# Altium PCB BT_806_PCB.PcbDoc
Units mil, origin at the board's own origin, x right, y up, seen from the top; angles counter-clockwise.
Board outline 3022.24 x 1519.71 mil, 2 copper layers (Top Layer, Bottom Layer); 53 components, 46 nets, 252 pads, 31 vias.
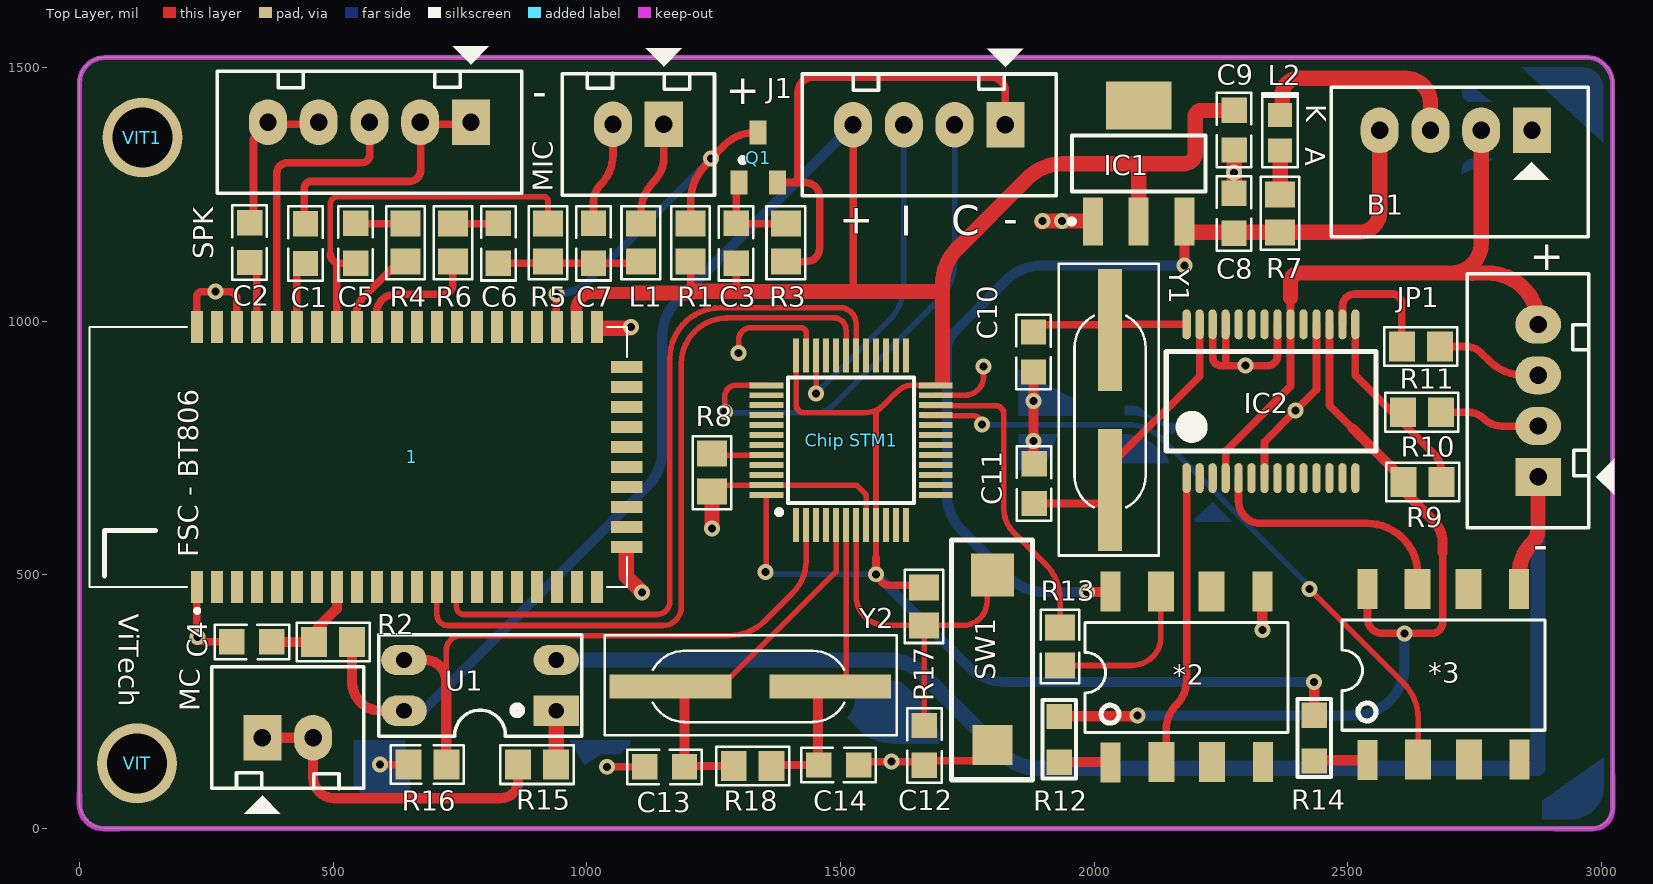
[diagram p0: Top Layer view]
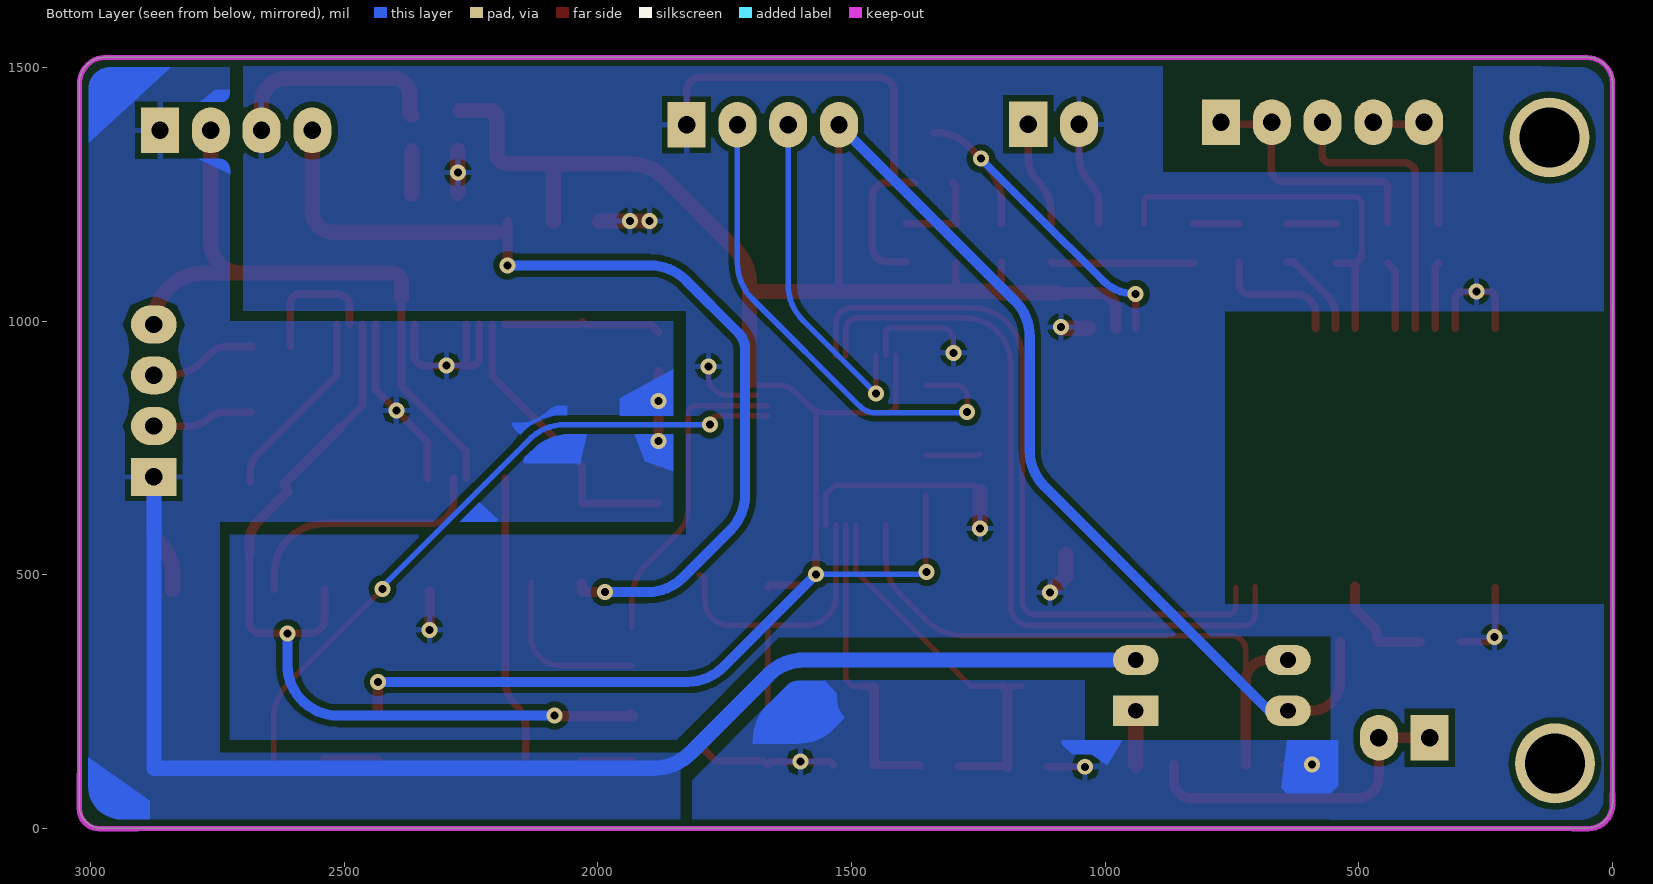
[diagram p1: Bottom Layer view, seen from below]
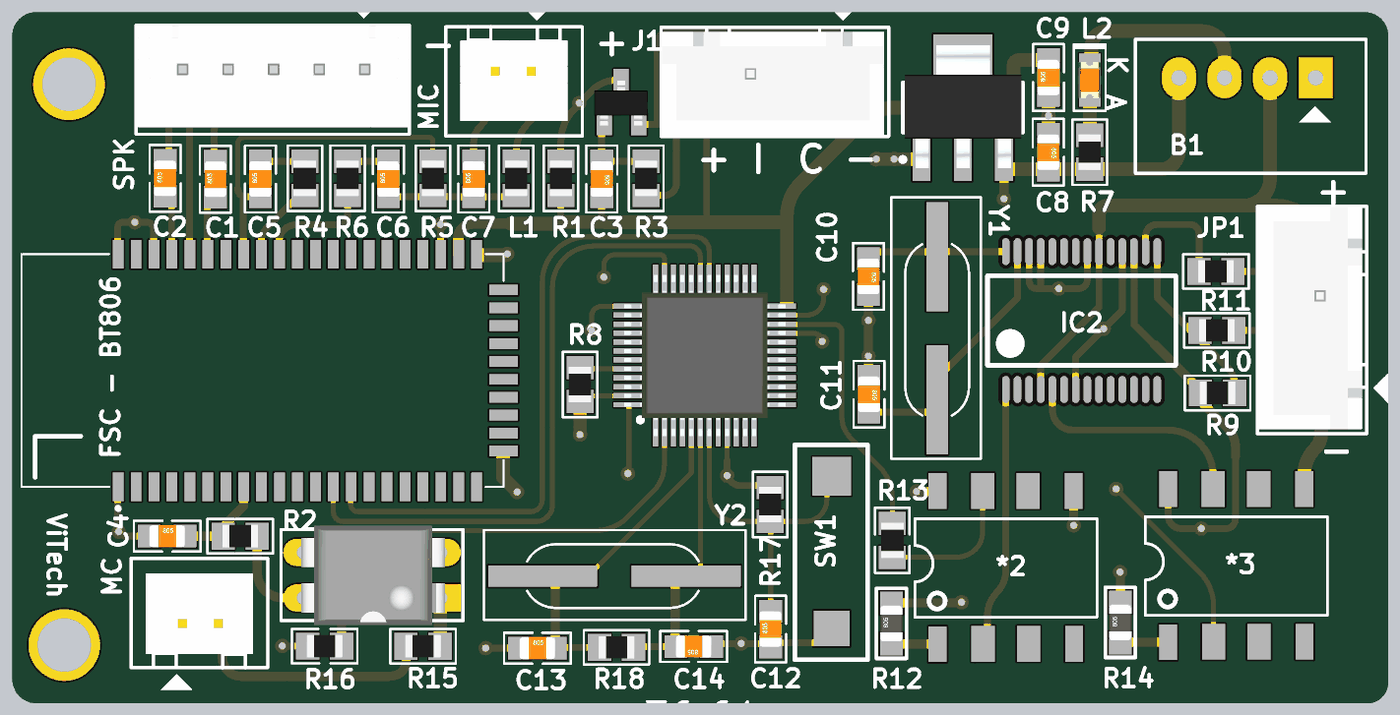
[diagram p2: 3D render of the assembled board from above, using the file's embedded part models]

## Layer stack, top to bottom
Top Solder: solder mask 0.4, Solder Resist, Dk 3.5
Top Layer: signal copper 1.4
Dielectric 1: dielectric 12.6, FR-4, Dk 4.8
Bottom Layer: signal copper 1.4
Bottom Solder: solder mask 0.4, Solder Resist, Dk 3.5

## Board outline
53.23,0.5 2976.38,0.5 ccw(c2976.38,46.04) 3021.91,46.04 3021.91,1468.35 ccw(c2970.05,1468.35) 2970.05,1520.21 51.76,1520.21 ccw(c51.76,1468.12) -0.33,1468.12 -0.33,54.07 ccw(c53.23,54.07)

## Design rules (kind name [scope] priority, off if disabled: settings)
Clearance [All] p1: gap=12
PolygonConnect [All] p1: connectstyle=Relief reliefconductorwidth=11 reliefentries=4 polygonreliefangle="90 Angle" airgapwidth=11
RoutingVias [All] p1: holewidth=15.75 width=31.5 viastyle="Through Hole" minholewidth=15.75 minwidth=31.5 maxholewidth=15.75 maxwidth=31.5
SolderMaskExpansion [All] p1: expansion=4
Width [All] p1: maxlimit=30 minlimit=11 preferedwidth=15
30 further rules are at their usual default settings.

## Components (designator, comment, footprint, x,y, rotation, side; value= is the part's Value field where it differs from the comment)
1 "FSC-BT806" FSCBT806 564.98,722.55 r90 top
*2 "HPCL2430" HPCL_A2430 2032.11,130.48 r90 top
*3 "HPCL2430" HPCL_A2430 2538.41,134.81 r90 top
B1 "" B0505S 2862.46,1375.92 r180 top
C1 "0.1µF" CAP_0805 445.74,1152.84 r90 top
C2 "0.1µF" CAP_0805 335.51,1154.87 r90 top
C3 "1uF" CAP_0805 1294.41,1153.46 r270 top
C4 "100nF" CAP_0805 340.04,368.07 r0 top
C5 "0.1µF" CAP_0805 544.67,1153.45 r90 top
C6 "0.1µF" CAP_0805 825.83,1153.45 r90 top
C7 "15pF" CAP_0805 1013.26,1153.45 r90 top
C8 "1uF" CAP_0805 2275.41,1212.37 r270 top
C9 "4.7uF" CAP_0805 2275.81,1376.55 r90 top
C10 "22pF" CAP_0805 1880.38,939.24 r270 top
C11 "22pF" CAP_0805 1881.49,679.93 r270 top
C12 "0.1uF" CAP_0805 1665.35,163.89 r90 top
C13 "22pF" CAP_0805 1153.22,121.64 r0 top
C14 "22pF" CAP_0805 1496.29,125.41 r180 top
"Chip STM1" "STM32F103C8T6" LQFP-48_19.6_393_58X11_SMD 1520.77,765.39 r90 top
IC1 "LM1117" SOT223-4N 2087.62,1310.4 r90 top
IC2 "PL2303HX" PL2303 2181.96,690.57 r0 top
J1 "" CON4 1824.8,1387.02 r180 top
JP1 "" CON4 2874.69,693.26 r90 top
L1 "15nH" RES_0805 1106.4,1154.82 r90 top
L2 "" LED_0805 2366.36,1371.03 r270 top
MC "" CON2 360.72,179.18 r0 top
MIC "JP2" CON2 1151.69,1387.88 r180 top (schematic designator MIC1)
Q1 "SI2302" SOT23A 1336.97,1322.32 r0 top
R1 "10K" RES_0805 1204.7,1154.82 r90 top
R2 "10K" RES_0805 500.14,367.93 r180 top
R3 "10K" RES_0805 1392.13,1154.83 r270 top
R4 "1K" RES_0805 642.38,1154.83 r270 top
R5 "2.2K" RES_0805 923.54,1154.82 r90 top
R6 "1K" RES_0805 736.1,1154.83 r270 top
R7 "1K" RES_0805 2366.36,1212.37 r270 top
R8 "10Kohm" RES_0805 1246.84,701.43 r270 top
R9 "1.5K" RES_0805 2647.07,682.85 r180 top
R10 "100R" RES_0805 2645.54,820.47 r0 top
R11 "100R" RES_0805 2643.68,950.08 r0 top
R12 "100R" "RES_0805 - Dup" 1930.66,221.03 r90 top
R13 "1K" RES_0805 1932.68,358.88 r90 top
R14 "100R" "RES_0805 - Dup" 2433.45,223.24 r90 top
R15 "100R" RES_0805 901.91,125.91 r180 top
R16 "100R" RES_0805 685.75,126.16 r0 top
R17 "10K" RES_0805 1664.52,437.74 r270 top
R18 "1M" RES_0805 1326.98,123.49 r0 top
SPK "JP5" CON5 771.64,1392.09 r180 top (schematic designator SPK1)
SW1 "" SW_342_SMD 1799.46,165.15 r270 top
U1 "PC817" DIP4/W0.3 939.82,232.26 r90 top
VIT "Comment" VIT 113.84,128.61 r0 top
VIT1 "Comment" VIT 124.28,1361.87 r0 top
Y1 "12MHz" XTAL_314_240X47_SMD 2031.07,667.55 r90 top
Y2 "8MHz" XTAL_314_240X47_SMD 1164.78,280.27 r0 top

## Footprints (in the part's own frame and the unit in brackets; to place one, negate y for a bottom-side part, rotate by r counter-clockwise, add the part's x,y. Pads: shape width x height; smd on the part's side, far side on the other; paste and mask are expansions set on the pad)
B0505S [mil] "CON4"
  rect 75x90 hole 34: 1(0,0)
  oval 75x90 hole 34: 2(100,0) 3(200,0) 4(300,0)
  silkscreen extent -111,-85 396,210
CAP_0805 [mil] "Ceramic Capacitor"
  rect 50x50 smd mask+3: 1(-39.37,0) 2(39.37,0)
  silkscreen extent -73,-34 73,34, body extent -39,-25 39,25, height 31
CON2 [mil] "CON2"
  rect 75x90 hole 34: 1(0,0)
  oval 75x90 hole 34: 2(100,0)
  silkscreen extent -100,-150 200,140, body extent -68,-70 168,107, height 236
CON4 [mil] "B1205S"
  rect 75x90 hole 34: 1(0,0)
  oval 75x90 hole 34: 2(100,0) 3(200,0) 4(300,0)
  silkscreen extent -100,-150 400,140, body extent -90,-90 398,136, height 276
CON5 [mil] "CON5"
  rect 75x90 hole 34: 1(0,0)
  oval 75x90 hole 34: 2(100,0) 3(200,0) 4(300,0) 5(400,0)
  silkscreen extent -100,-150 500,140, body extent -101,-98 496,125, height 288
DIP4/W0.3 [mil] "4 PIN, W 300mil, Pin to pin 100mil"
  rect 60x90 hole 31: 1(0,0)
  oval 60x90 hole 31: 2(100,0) 3(100,300) 4(0,300)
  silkscreen extent -50,-50 150,350, body extent -59,-10 159,305, height 170
FSCBT806 [mm]
  rect 1.6x0.6 smd: 1(-6.25,8.45) 2(-6.25,7.45) 3(-6.25,6.45) 4(-6.25,5.45) 5(-6.25,4.45) 6(-6.25,3.45) 7(-6.25,2.45) 8(-6.25,1.45) 9(-6.25,0.45) 10(-6.25,-0.55) 11(-6.25,-1.55) 12(-6.25,-2.55) 13(-6.25,-3.55) 14(-6.25,-4.55) 15(-6.25,-5.55) 16(-6.25,-6.55) 17(-6.25,-7.55) 18(-6.25,-8.55) 19(-6.25,-9.55) 20(-6.25,-10.55) 21(-6.25,-11.55) 32(6.75,-11.55) 33(6.75,-10.55) 34(6.75,-9.55) 35(6.75,-8.55) 36(6.75,-7.55) 37(6.75,-6.55) 38(6.75,-5.55) 39(6.75,-4.55) 40(6.75,-3.55) 41(6.75,-2.55) 42(6.75,-1.55) 43(6.75,-0.55) 44(6.75,0.45) 45(6.75,1.45) 46(6.75,2.45) 47(6.75,3.45) 48(6.75,4.45) 49(6.75,5.45) 50(6.75,6.45) 51(6.75,7.45) 52(6.75,8.45)
  rect 0.6x1.6 smd: 22(-4.25,-13.05) 23(-3.25,-13.05) 24(-2.25,-13.05) 25(-1.25,-13.05) 26(-0.25,-13.05) 27(0.75,-13.05) 28(1.75,-13.05) 29(2.75,-13.05) 30(3.75,-13.05) 31(4.75,-13.05)
  silkscreen extent -7.55,-13.05 6.75,13.85, body extent -6.22,-13.08 6.73,13.84, height 0.25
HPCL_A2430 [mm] "A2430"
  rect 2x1 smd: 1(0,0) 4(0.025,-7.62) 5(8.56,-7.595) 8(8.56,0)
  rect 2x1.3 smd: 2(0.025,-2.54) 3(0.025,-5.08) 6(8.56,-5.055) 7(8.56,-2.515)
  silkscreen extent 1.5,-8.89 7.01,1.27
LED_0805 [mm] "LED"
  rect 1.2x1.2 smd mask+0.076: A(0.889,0) K(-0.889,0)
  silkscreen extent -1.99,-0.89 1.73,0.89, body extent -1.01,-0.62 1.01,0.63, height 1.1
LQFP-48_19.6_393_58X11_SMD [mm] "48LQFP"
  rect 1.7x0.3 smd mask+0.076: 1(-4.238,2.75) 2(-4.238,2.25) 3(-4.238,1.75) 4(-4.238,1.25) 5(-4.238,0.75) 6(-4.238,0.25) 7(-4.238,-0.25) 8(-4.238,-0.75) 9(-4.238,-1.25) 10(-4.238,-1.75) 11(-4.238,-2.25) 12(-4.238,-2.75) 25(4.238,-2.75) 26(4.238,-2.25) 27(4.238,-1.75) 28(4.238,-1.25) 29(4.238,-0.75) 30(4.238,-0.25) 31(4.238,0.25) 32(4.238,0.75) 33(4.238,1.25) 34(4.238,1.75) 35(4.238,2.25) 36(4.238,2.75)
  rect 0.3x1.7 smd mask+0.076: 13(-2.75,-4.238) 14(-2.25,-4.238) 15(-1.75,-4.238) 16(-1.25,-4.238) 17(-0.75,-4.238) 18(-0.25,-4.238) 19(0.25,-4.238) 20(0.75,-4.238) 21(1.25,-4.238) 22(1.75,-4.238) 23(2.25,-4.238) 24(2.75,-4.238) 37(2.75,4.238) 38(2.25,4.238) 39(1.75,4.238) 40(1.25,4.238) 41(0.75,4.238) 42(0.25,4.238) 43(-0.25,4.238) 44(-0.75,4.238) 45(-1.25,4.238) 46(-1.75,4.238) 47(-2.25,4.238) 48(-2.75,4.238)
  silkscreen extent -3.72,-3.15 3.15,3.72, body extent -4.5,-4.5 4.5,4.5, height 1.7
PL2303 [mil] "PL2303"
  oval 16.53x59.03 smd mask+7.9: 1(0,0) 2(25.6,0) 3(51.18,0) 4(76.78,0) 5(102.37,0) 6(127.97,0) 7(153.57,0) 8(179.15,0) 9(204.75,0) 10(230.35,0) 11(255.93,0) 12(281.53,0) 13(307.12,0) 14(332.7,0) 15(332.7,303.18) 16(307.12,303.18) 17(281.53,303.18) 18(255.93,303.18) 19(230.35,303.18) 20(204.75,303.18) 21(179.15,303.18) 22(153.57,303.18) 23(127.97,303.18) 24(102.37,303.18) 25(76.78,303.18) 26(51.18,303.18) 27(25.6,303.18) 28(0,303.18)
  silkscreen extent -40,53 373,250
RES_0805 [mm] "Resister"
  rect 1.3x1.5 smd mask+0.076: 1(0.95,0) 2(-0.95,0)
  silkscreen extent -1.83,-0.97 1.83,0.97, body extent -1,-0.63 1,0.62, height 0.5
"RES_0805 - Dup" [mil] "Resister"
  rect 50x50 smd: 1(0,0) 2(-90,0)
  silkscreen extent -122,-33 32,33, body extent -84,-25 -6,25, height 31
SOT23A [mm] "SOT 23A"
  rect 0.85x1.2 smd: 1(-0.94,-1.245) 2(0.005,1.25) 3(0.985,-1.25)
  silkscreen extent -0.88,-0.25 -0.64,0, body extent -1.5,-1.3 1.5,1.2, height 1.06
SOT223-4N [mm] "SOT223, 4-Leads, Body 6.5x3.5mm, Pitch 2.3mm, Lead Span 7mm, IPC Medium Density"
  rect 2.4x1 smd: 1(-2.9,2.3) 2(-2.9,0) 3(-2.9,-2.3)
  rect 2.4x3.3 smd: 4(2.9,0)
  silkscreen extent -3.02,-3.35 1.4,3.47, body extent -3.39,-3.27 3.5,3.23, height 1.72
SW_342_SMD [mm] "CASE: SMD"
  rect 2x2 smd: 1(0,0)
  rect 2.15x2.15 smd: 2(-8.5,0)
  silkscreen extent -10.25,-2.06 1.75,2, body extent -7.17,-1.79 -1.17,1.71, height 2.4
VIT [mm] "VIT"
  round 4 hole 3: VIT1(0,0)
XTAL_314_240X47_SMD [mm] "CASE: TH"
  rect 6.096x1.2 smd: 1(0,0) 2(8,0)
  silkscreen extent -3.29,-2.44 11.32,2.57, body extent -2.99,-2.27 10.9,2.41, height 3.05

## Part data
B1: library part B0505S, "5V to 5V"
C1 C2 C5 C6 C7 C12: library part CAP_0.1uF-50V-5%-0805, "0.1µF ±5% 50V Ceramic Capacitor X7R 0805 (2012 Metric)"
C3 C8: library part CAP_1uF-50V-5%-0805, "1µF ±5% 50V Ceramic Capacitor X7R 0805 (2012 Metric)"
C4: library part CAP_1uF-50V-5%-0805, "100µF ±5% 50V Ceramic Capacitor X7R 0805 (2012 Metric)"
C9: library part CAP_1uF-50V-5%-0805, "4.7µF ±5% 50V Ceramic Capacitor X7R 0805 (2012 Metric)"
C10 C11 C13 C14: library part CAP_22pF-50V-5%-0805, "22pF ±5% 50V Ceramic Capacitor C0G, NP0 0805 (2012 Metric)"
"Chip STM1": library part "IC-STM32F103C8T6 _1", "ARM® Cortex®-M3 STM32F1 Microcontroller IC 32-Bit 72MHz 64KB (64K x 8) FLASH"
IC1: "Available in 1.8V, 2.5V, 2.85V, 3.3V, 5V, and  Adjustable Versions"
IC2: "USB - RS232 Converter"
J1 JP1: library part Con4, "Connector 4"
L1: library part RES_1K-0.125W-1%-0805, "Conductor 15nH"
L2: library part LED-RED_10mA-0805, "Red 621nm LED Indication - Discrete 2V 0805 (2012 Metric)"
MC MIC: library part Con2, "Connector 2"
Q1: library part DV3
R1 R2 R3 R4 R6: library part RES_10K-0.125W-1%-0805_1, "10 kOhms ±1% 0.125W, 1/8W Chip Resistor 0805 (2012 Metric) Moisture Resistant Thick Film"
R5: library part RES_10K-0.125W-1%-0805_1, "2.2kOhms ±1% 0.125W, 1/8W Chip Resistor 0805 (2012 Metric) Moisture Resistant Thick Film"
R7 R13: library part RES_10K-0.125W-1%-0805_1, "1 kOhms ±1% 0.125W, 1/8W Chip Resistor 0805 (2012 Metric) Moisture Resistant Thick Film"
R8: library part RES_10K-0.125W-1%-0805, "10 kOhms ±1% 0.125W, 1/8W Chip Resistor 0805 (2012 Metric) Moisture Resistant Thick Film"
R9: library part RES_1.5K-0.125W-1%-0805, "1.5 kOhms ±1% 0.125W, 1/8W Chip Resistor 0805 (2012 Metric) Thick Film"
R10 R11: library part RES_0ohm-0.125W-1%-0805_1, "1000Ohms ±1% 0.125W, 1/8W Chip Resistor 0805 (2012 Metric) Moisture Resistant Thick Film"
R12: library part RES_10K, "Resistor 10K value Chip Resistor 0805 Moisture Resistant Thick Film"
R14: library part RES_10K, "Resistor 100R value Chip Resistor 0805 Moisture Resistant Thick Film"
R15 R16: library part RES_1K-0.125W-1%-0805, "1 kOhms ±1% 0.125W, 1/8W Chip Resistor 0805 (2012 Metric) Moisture Resistant Thick Film"
R17: library part RES_10MOHM-0.125W-1%-0805, "10K ±1% 0.125W, 1/8W Chip Resistor 0805 (2012 Metric) Automotive AEC-Q200, High Voltage Thick Film"
R18: library part RES_10MOHM-0.125W-1%-0805, "1 MOhms ±1% 0.125W, 1/8W Chip Resistor 0805 (2012 Metric) Automotive AEC-Q200, High Voltage Thick Film"
SPK: library part Con5, "Connector 5"
SW1: library part SW_KSR223GLFG-SMD, "Tactile Switch SPST-NO Top Actuated Surface Mount"
U1: "Single Opto"
Y1 Y2: library part XTAL_8MHZ-LFXTAL030234, "Crystals 8MHz 22pF -20C 70C"

## Via types
v1: diameter 31.5, hole 15.75, Top Layer to Bottom Layer, tented both sides, 31 vias

## Nets (pads, with @x,y where several pads share a name; then routed paths per layer and width w, separated by ;. In a path a pad name is that pad's centre, name@x,y a point inside that pad or via, vN(x,y) a via of type N, cw(c..) or ccw(c..) an arc to the next point about the centre after c; other vN are vias at no path point)
3V3: 1.33 "Chip STM1.9" "Chip STM1.24" "Chip STM1.36" "Chip STM1.48" C3.2 C9.2 IC1.2 J1.4 R1.2 R2.2 R14.1 R17.2 U1.4 | length 6312.3
  Top Layer w11: v1(1351.92,505.71) 1353.92,507.71 1353.92,657.12 ; 1412.5,932.24 1412.5,835.32 ccw(c1428.06,835.32) 1428.06,819.76 1549.46,819.76 ccw(c1549.46,869.31) 1584.49,834.27 1606.37,856.15 cw(c1657.62,804.9) 1606.44,856.22 ; 1569.98,533.9 1569.98,598.54 1569.98,819.76 1606.44,856.22 ; 1687.62,873.66 1640.88,873.66 ccw(c1640.88,834.59) 1631.55,872.53 ccw(c1640.88,834.59) 1613.26,862.21 ccw(c1657.62,804.9) 1606.44,856.22
  Top Layer w15: 1204.69,1055.31 1204.69,1058.88 R1.2 ; C3.2 1294.41,1064.47 1300.01,1058.88 ; 1524.8,1058.62 J1.4 ; v1@1569.98,504.07 1569.98,533.9 ; v1@1573.15,504.07 ccw(c1597.96,504.07) 1597.96,479.26 1660.4,479.26 cw(c1660.4,475.14) R17.2
  Top Layer w20: R2.2 537.54,288.92 ccw(c594.2,288.92) 540.46,270.97 ccw(c594.2,288.92) 576.24,235.18 ccw(c594.2,288.92) 594.2,232.26 U1.4 ; v1(2432.92,289.06) 2433.45,288.52 R14.1
  Top Layer w23: 1.33@979.38,986.07 979.38,1023.2 cw(c1011.49,1023.2) 1011.49,1055.31 1093.81,1055.31
  Top Layer w30: 1093.81,1055.31 1204.69,1055.31 ; 1204.69,1058.88 1300.01,1058.88 ; 1300.54,1058.35 1524.8,1058.35 ; 1524.8,1058.62 1701.09,1058.62 ; 1701.09,882.67 1701.09,1058.62 ; IC1.2 2087.62,1310.37 ; C9.2@2272.64,1414.96 2210.82,1414.96 ccw(c2210.82,1403.12) 2198.98,1403.12 2198.98,1331.74 cw(c2177.61,1331.74) 2177.61,1310.37 2087.62,1310.37 ; 1701.09,1058.62 1701.09,1072.81 cw(c1801.09,1072.81) 1730.38,1143.52 1867.94,1281.08 cw(c1938.65,1210.37) 1938.65,1310.37 2087.62,1310.37
  Bottom Layer w11: v1(1351.92,505.71) 1356.4,501.23 v1(1569.95,501.23)
  Bottom Layer w20: U1.4 677.32,232.26 1119.51,674.45 ccw(c1048.8,745.16) 1148.8,745.16 1148.8,969.61 cw(c1248.8,969.61) 1178.09,1040.32 J1.4 ; v1(1569.95,501.23) 1752.84,318.34 ccw(c1823.55,389.06) 1764.71,308.2 ccw(c1823.55,389.06) 1823.55,289.06 v1(2432.92,289.06)
3V3_PL2303: *3.8 IC2.17 R9.1 R12.1 | length 1721.8
  Top Layer w15: IC2.17 2463.49,834.05 2508.76,788.78 ; *3.8 2538.41,414.14 ccw(c2567.85,414.14) 2567.85,384.69 v1(2611.43,384.73) 2665.23,384.73 ccw(c2665.23,405.96) 2686.46,405.96 2686.46,544.16
  Top Layer w20: R12.1 R12.1@1931.11,221.48 ; R12.1@1934.35,224.72 R12.1@1931.11,221.48 ; v1(2084.77,222.66) 2083.6,221.48 R12.1@1931.11,221.48 ; 2508.76,788.78 2617.14,680.4 2611.73,663.81 2668.58,606.95 cw(c2625.42,563.79) 2686.46,563.79 2686.46,544.16
  Bottom Layer w20: v1(2084.77,222.66) 2511.43,222.66 ccw(c2511.43,322.66) 2611.43,322.66 v1(2611.43,384.73) v1@2610.48,385.69
DC_CHECK: "Chip STM1.2" R16.1 U1.3 | length 1203.3
  Top Layer w11: U1.3 U1.3@681.22,332.26 ; 723.15,290.33 723.15,351.03 cw(c752.39,351.03) 752.39,380.26 1280.37,380.26 ccw(c1280.37,480.26) 1351.08,409.55 1406.25,464.72 ccw(c1343.64,527.34) 1432.19,527.34 1432.19,598.54
  Top Layer w20: U1.3@681.22,332.26 cw(c681.22,290.33) 723.15,290.33 R16.1
GND: *3.5 B1.1 C10.2 C11.1 IC2.7 IC2.18 IC2.21 IC2.25 IC2.26 JP1.1 U1.2 | length 3710.6
  Top Layer w15: IC2.26 2233.14,928.77 ccw(c2249.47,928.77) 2249.47,912.45 2258.71,912.45 v1(2298.28,912.45) 2342.09,912.45 ccw(c2342.09,931.47) 2361.11,931.47 IC2.21 ; 2258.74,912.48 IC2.25 ; IC2.7 2335.53,762.59 v1(2397.03,824.09) 2437.89,864.95 IC2.18
  Top Layer w20: C10.2 1880.15,899.63 v1(1880.15,842.61) v1(1880.15,763.97) 1880.15,720.64 C11.1
  Top Layer w30: *3.5 2837.41,502.2 cw(c2920.8,502.2) 2861.83,561.17 ccw(c2830.78,592.22) 2874.69,592.22 JP1.1 ; B1.1 B1.1@2866.94,1375.92
  Bottom Layer w20: 1939.44,842.61 1941.21,844.38
  Bottom Layer w30: U1.2 1593.06,332.26 cw(c1593.06,232.26) 1663.77,302.97 1818.34,148.41 ccw(c1889.05,219.12) 1889.05,119.12 2874.69,119.12 JP1.1
GND_BT: 1.1 1.22 1.32 1.50 1.52 "Chip STM1.8" "Chip STM1.23" "Chip STM1.35" "Chip STM1.47" *2.5 B1.3 C4.1 C7.2 C8.1 C9.1 C12.1 C13.1 C14.1 IC1.1 J1.1 L2.K MIC.2 Q1.3 R3.1 R8.1 R16.2 SW1.1 | length 3623.7
  Top Layer w11: R8.1 1259.63,676.81 1353.92,676.81 1531.62,676.81 1550.3,658.13 1550.3,598.54 ; v1(1299.12,937.64) 1299.12,963.47 cw(c1322.57,963.47) 1322.57,986.93 1422.66,986.93 cw(c1422.66,977.39) 1432.19,977.39 1432.19,932.24 ; 1687.62,853.97 1744.97,853.97 ccw(c1744.97,890.79) 1781.79,890.79 v1(1781.79,910.81) ccw(c1780.61,910.81) v1@1780.61,911.99
  Top Layer w15: 1.1@231.34,474.26 231.34,386.23 ccw(c249.5,386.23) v1@233.33,377.98 ; 1.52@231.34,986.07 231.34,1047.83 cw(c241.68,1047.83) 241.68,1058.17 v1(268.66,1058.17) 295.4,1058.17 cw(c295.4,1043.48) 310.08,1043.48 1.50@310.08,986.07 ; v1@233.19,375.06 v1(233.19,377.84) v1@233.33,377.98 ; C4.1 249.5,368.07 cw(c249.5,386.23) v1@233.33,377.98 ; v1(592.62,126.7) 593.15,126.16 R16.2 ; C7.2 1013.26,1235.76 cw(c1059.28,1235.76) 1026.74,1268.3 ccw(c966.49,1328.55) 1051.69,1328.55 MIC.2 ; v1(1039.6,121.89) 1039.35,121.64 C13.1 ; v1@1084.61,986.07 v1(1087.21,988.67) ; Q1.3 1416.2,1273.1 ; R3.1 1432.41,1117.42 ccw(c1432.41,1143.74) 1458.73,1143.74 1458.73,1245.1 ccw(c1430.73,1245.1) 1430.73,1273.1 1416.2,1273.1 ; C14.1 1542.26,132.01 v1(1600.75,132.01) 1657.86,132.01 C12.1 1674.5,133.67 1767.99,133.67 SW1.1 ; J1.1 1824.8,1453.2 ccw(c1797.37,1453.2) 1797.37,1480.62 1445.74,1480.62 ccw(c1445.74,1451.08) 1416.2,1451.08 1416.2,1273.1
  Top Layer w20: v1(2331.11,391.8) *2.5
  Top Layer w30: 1032.26,986.07 v1@1084.61,986.07 ; 1077.8,540.65 1077.8,497.1 1108.72,466.18 v1(1108.72,465.27) ; v1(1246.6,591.34) 1246.85,591.59 R8.1 ; v1@1896.3,1195.93 cw(c1897.65,1195.93) v1(1897.65,1197.29) v1(1936.67,1197.29) 1996.01,1197.29 IC1.1 ; C8.1 2275.8,1252.13 v1(2275.8,1292.63) C9.1 ; L2.K ccw(c2366.36,1409.95) 2370.27,1409.95 2370.27,1446.25 cw(c2402.56,1446.25) 2402.56,1478.53 2613.71,1478.53 cw(c2613.71,1429.78) 2662.46,1429.78 B1.3
Net1_8: 1.8 C4.2 R2.1 | length 206.3
  Top Layer w20: C4.2 455.23,368.07 R2.1@458.69,371.53 ; R2.1 cw(c513,367.93) 463.84,378.38 cw(c491.52,378.38) 471.94,397.95 506.93,432.94 ccw(c504.63,435.25) 507.89,435.25 1.8
Net1_34: 1.34 Q1.2 R1.1 | length 728.5
  Top Layer w15: 1.34@940.01,986.07 v1(940.01,1053.36) ; R1.1 1204.69,1236.25 cw(c1304.69,1236.25) 1233.98,1306.96 v1@1246.2,1319.17 ; v1(1244.97,1320.4) 1272.12,1347.55 cw(c1329.25,1290.42) 1329.25,1371.21 cw(c1337.17,1272.37) Q1.2
  Bottom Layer w15: v1(940.01,1053.36) ccw(c940.01,1144.93) 1004.73,1080.16 1138.52,1213.95 v1(1244.97,1320.4)
Net1_43: 1.43 R6.1 | length 257.1
  Top Layer w15: 1.43@585.67,986.07 585.67,1015.66 cw(c623.11,1015.66) 596.62,1042.11 ; 596.64,1042.13 cw(c622.35,1016.42) 622.35,1052.78 715.56,1052.78 ccw(c715.56,1073.33) 736.1,1073.33 R6.1
Net1_44: 1.44 R4.1 | length 176.6
  Top Layer w15: 1.44@546.3,986.07 546.3,1014.61 cw(c593.19,1014.61) 560.04,1047.77 629.7,1117.42 R4.1
Net1_45: 1.45 C5.1 R5.1 | length 779
  Top Layer w11: 494.84,1131.93 494.84,1231.32 cw(c508.47,1231.32) 508.47,1244.95 915.61,1244.95 cw(c915.61,1237.02) 923.54,1237.02 R5.1
  Top Layer w15: 494.84,1131.93 ccw(c512.67,1131.93) 496.4,1124.62 ccw(c512.67,1131.93) 505.37,1115.65 ccw(c512.67,1131.93) 512.67,1114.09 ; 1.45@506.93,986.07 506.93,1114.09 512.67,1114.09 ; C5.1 512.67,1114.09
Net1_47: 1.47 C1.1 | length 134.3
  Top Layer w15: 1.47@428.19,986.07 428.19,1098.89 C1.1@443.39,1114.09
Net1_48: 1.48 SPK.3 | length 569.3
  Top Layer w15: 1.48@388.82,986.07 388.82,1290.48 cw(c410.41,1290.48) 410.41,1312.06 556.28,1312.06 ccw(c556.28,1328.4) 572.61,1328.4 SPK.3@572.61,1387.88
Net1_49: 1.49 C2.1 | length 130.6
  Top Layer w15: C2.1@343.27,1114.09 349.45,1107.9 1.49@349.45,986.07
Net*2_1: *2.1 R12.2 | length 101.7
  Top Layer w20: R12.2 2031.56,131.03 *2.1
Net*2_7: *2.7 R13.2 | length 338.3
  Top Layer w11: R13.2 2072.67,321.49 ccw(c2072.67,382.79) 2080.41,321.98 ccw(c2072.67,382.79) 2116.02,339.44 ccw(c2079.59,375.87) 2131.11,375.87 *2.7 *2.7@2131.11,485.52
Net*3_1: *3.1 R14.2 | length 105.6
  Top Layer w20: R14.2 2435.02,134.81 *3.1
NetC1_2: C1.2 SPK.1 SPK.2 | length 509
  Top Layer w15: C1.2@443.39,1192.83 443.39,1262.13 cw(c456.5,1262.13) 456.5,1275.24 650.11,1275.24 ccw(c650.11,1297.74) 672.61,1297.74 672.61,1387.88 SPK.1@772.61,1387.88
NetC2_2: C2.2 SPK.4 SPK.5 | length 307.2
  Top Layer w15: C2.2@343.27,1192.83 343.27,1358.53 372.61,1387.88 SPK.4@472.61,1387.88
NetC3_1: C3.1 Q1.1 R3.2 | length 180.8
  Top Layer w15: Q1.1 1294.41,1267.76 C3.1 1295.01,1192.23 R3.2
NetC5_2: C5.2 R4.2 | length 98
  Top Layer w15: C5.2 545.27,1192.23 R4.2
NetC6_1: C6.1 C7.1 L1.2 R5.2 | length 282
  Top Layer w15: C6.1 C7.1 1103.06,1114.09 L1.2
NetC6_2: C6.2 R6.2 | length 90
  Top Layer w15: R6.2 825.22,1192.23 C6.2
NetC10_1: C10.1 IC2.28 Y1.2 | length 312.2
  Top Layer w15: C10.1 1894.78,993.01 2024.54,993.01 2030.57,999.03 2035.85,993.75 IC2.28
NetC11_2: C11.2 IC2.27 Y1.1 | length 574.7
  Top Layer w15: C11.2 2029.06,640.55 2030.57,642.06 2030.57,714.69 2207.56,891.68 IC2.27
"NetChip STM1_44": "Chip STM1.44" R8.2 | length 108.3
  Top Layer w11: R8.2 1249.81,735.86 1353.92,735.86
NetIC2_15: IC2.15 R9.2 R10.2 | length 379.1
  Top Layer w15: IC2.15 2514.66,893.19 2669.95,737.9 cw(c2634.91,702.86) 2684.47,702.86 R9.2
NetIC2_16: IC2.16 R11.2 | length 261.4
  Top Layer w15: IC2.16 2489.08,1029 cw(c2513.46,1029) 2491.4,1039.38 cw(c2513.46,1029) 2503.08,1051.07 cw(c2513.46,1029) 2513.46,1053.39 2586.98,1053.39 cw(c2586.98,1034.09) 2606.28,1034.09 R11.2
NetJP1_2: JP1.2 R10.1 | length 199
  Top Layer w15: R10.1 2737.63,820.47 cw(c2737.63,778.46) 2767.34,808.17 ccw(c2803.33,844.16) 2803.33,793.26 JP1.2
NetJP1_3: JP1.3 R11.1 | length 210.9
  Top Layer w15: R11.1 2707.75,950.08 2731.63,950.08 cw(c2731.63,906.02) 2762.79,937.18 2777.41,922.55 ccw(c2848.13,993.26) 2848.13,893.26 JP1.3
NetL1_1: L1.1 MIC.1 | length 207.8
  Top Layer w15: L1.1 1106.4,1212.41 cw(c1195.8,1212.41) 1132.58,1275.62 ; 1132.61,1275.65 ccw(c1086.45,1321.76) 1151.69,1321.76 MIC.1
NetL2_A: L2.A R7.2 | length 86.3
  Top Layer w30: R7.2 L2.A
NetMC_1: MC.1 MC.2 R15.1 | length 656.8
  Top Layer w20: MC.1 MC.2 460.72,101.75 ccw(c502.73,101.75) 502.73,59.75 824.82,59.75 ccw(c824.82,99.43) 832,60.4 ccw(c832,92.91) 864.5,92.91 R15.1
NetR15_2: R15.2 U1.1 | length 106.6
  Top Layer w30: R15.2 939.82,126.42 U1.1
NRST: "Chip STM1.7" C12.2 R17.1 SW1.2 | length 713.5
  Top Layer w11: 1530.61,598.54 1530.61,459.29 ccw(c1589.57,459.29) 1589.57,400.34 R17.1 ; C12.2 1665.35,399.5 R17.1 ; SW1.2 ccw(c1799.46,489.2) 1788.87,489.2 1788.87,448.22 cw(c1740.98,448.22) 1740.98,400.34 R17.1
RX1_STM: 1.13 "Chip STM1.31" | length 1489.4
  Top Layer w11: 1.13 704.74,421.54 ccw(c726.05,421.54) 726.05,400.23 1149.98,400.23 ccw(c1149.98,436.51) 1186.26,436.51 1186.26,916.17 cw(c1276.05,916.17) 1276.05,1005.95 1276.05,1006.48 1487.04,1006.48 cw(c1487.04,982.59) 1510.93,982.59 1510.93,932.24
RX3_STM: "Chip STM1.22" R13.1 | length 625.1
  Top Layer w11: 1665.86,833.29 1805.88,833.29 cw(c1805.88,817.17) 1822,817.17 1822,629.19 ccw(c1884.89,629.19) 1840.4,584.73 1903.39,521.74 cw(c1832.68,451.03) 1932.68,451.03 R13.1
RX_BT: 1.14 "Chip STM1.30" | length 1464.6
  Top Layer w11: 1.14@743.15,474.26 743.15,436.98 ccw(c758.27,436.98) 758.27,421.86 1137.87,421.86 ccw(c1137.87,447.71) 1163.72,447.71 1163.72,926.38 cw(c1263.72,926.38) 1263.72,1026.38 1499.39,1026.38 cw(c1499.39,995.15) 1530.61,995.15 1530.61,932.24
RX_PL: *3.7 IC2.5 | length 509.9
  Top Layer w15: IC2.5 2284.33,645.64 ccw(c2328.58,645.64) 2328.58,601.39 2537.41,601.39 cw(c2537.41,501.39) 2637.41,501.39 *3.7
SWCLK: "Chip STM1.37" J1.2 | length 991.4
  Top Layer w11: v1(1272.09,820.5) 1272.09,851.2 1271.97,851.31 cw(c1294.32,851.31) 1294.32,873.66 1353.92,873.66
  Bottom Layer w11: v1(1272.09,820.5) 1273.43,819.15 1450.97,819.15 ccw(c1450.97,866.53) 1484.45,833.01 1695.51,1044.07 ccw(c1624.8,1114.78) 1724.8,1114.78 J1.2
SWDIO: "Chip STM1.34" J1.3 | length 671.4
  Top Layer w11: v1(1451.87,857.58) 1451.87,932.24
  Bottom Layer w11: v1(1451.87,857.58) 1595.51,1001.21 ccw(c1524.8,1071.92) 1624.8,1071.92 J1.3
TX3_STM: "Chip STM1.21" *3.2 | length 1322.1
  Top Layer w11: 1665.86,813.61 1761.16,813.61 cw(c1761.16,796.22) v1(1778.55,796.22) ; v1(2424.27,471.93) 2609.12,287.08 cw(c2538.41,216.37) 2638.41,216.37 *3.2
  Bottom Layer w11: v1(1778.55,796.22) 2064.1,796.22 cw(c2064.1,696.22) 2130.27,771.19 2131.79,769.68 2131.86,769.68 2424.27,477.27 v1(2424.27,471.93)
TX_PL: *2.2 IC2.1 | length 560.3
  Top Layer w15: *2.2@2141.62,141 2141.62,193.87 cw(c2213.94,193.87) 2162.8,245 ccw(c2116.56,291.24) 2181.96,291.24 IC2.1
VCC: B1.2 IC2.4 IC2.20 JP1.4 | length 1324.2
  Top Layer w15: IC2.4 2258.74,744.01 2386.71,871.97 IC2.20 2386.71,1045.58
  Top Layer w30: 2386.71,1045.58 2386.71,1076.26 cw(c2405.43,1076.26) 2405.43,1094.99 2703.69,1094.99 ; 2745.02,1094.07 ccw(c2731.54,994.99) 2731.54,1094.99 ; B1.2 2762.46,1153.76 cw(c2703.69,1153.76) 2703.69,1094.99 ; JP1.4 2874.69,994.99 ccw(c2774.69,994.99) 2774.69,1094.99 2731.54,1094.99 ; 2703.69,1094.99 2731.54,1094.99
VCC_5V: *2.8 B1.4 C8.2 IC1.3 R7.1 | length 1895.9
  Top Layer w20: v1(1985.89,466.12) 2030.74,466.12 *2.8 *2.8@2032.11,484.13 ; v1(2177.86,1109.92) 2178.17,1110.23 IC1.3
  Top Layer w30: 2199.43,1174.97 R7.1 2521.93,1174.97 ccw(c2521.93,1215.5) 2562.46,1215.5 B1.4
  Bottom Layer w20: v1(1985.89,466.12) 1901.99,466.12 cw(c1901.99,566.12) 1831.28,495.4 1738.89,587.8 cw(c1809.6,658.51) 1709.6,658.51 1709.6,944.34 cw(c1756.9,944.34) 1723.45,977.79 1826.3,1080.63 cw(c1897.01,1009.92) 1897.01,1109.92 v1(2177.86,1109.92)
XA: "Chip STM1.5" C13.2 R18.2 Y2.1 | length 772
  Top Layer w11: Y2.1 1201.11,280.27 1264.82,280.27 1491.24,506.7 1491.24,598.54
  Top Layer w15: C13.2 1194.45,123.49 R18.2
  Top Layer w20: C13.2 1192.6,271.76 Y2.1@1201.11,280.27
XB: "Chip STM1.6" C14.2 R18.1 Y2.2 | length 756.8
  Top Layer w11: Y2.2 1497.74,280.27 1510.93,293.46 1510.93,598.54
  Top Layer w15: R18.1 1366.3,125.4 C14.2 1456.92,270.01 1467.18,280.27 Y2.2
  Top Layer w20: C14.2@1455.43,129.01 Y2.2@1455.43,279.13
pads on no net: 1.2 1.3 1.4 1.5 1.6 1.7 1.9 1.10 1.11 1.12 1.15 1.16 1.17 1.18 1.19 1.20 1.21 1.23 1.24 1.25 1.26 1.27 1.28 1.29 1.30 1.31 1.35 1.36 1.37 1.38 1.39 1.40 1.41 1.42 1.46 1.51 "Chip STM1.1" "Chip STM1.3" "Chip STM1.4" "Chip STM1.10" "Chip STM1.11" "Chip STM1.12" "Chip STM1.13" "Chip STM1.14" "Chip STM1.15" "Chip STM1.16" "Chip STM1.17" "Chip STM1.18" "Chip STM1.19" "Chip STM1.20" "Chip STM1.25" "Chip STM1.26" "Chip STM1.27" "Chip STM1.28" "Chip STM1.29" "Chip STM1.32" "Chip STM1.33" "Chip STM1.38" "Chip STM1.39" "Chip STM1.40" "Chip STM1.41" "Chip STM1.42" "Chip STM1.43" "Chip STM1.45" "Chip STM1.46" *2.3 *2.4 *2.6 *3.3 *3.4 *3.6 IC1.4 IC2.2 IC2.3 IC2.6 IC2.8 IC2.9 IC2.10 IC2.11 IC2.12 IC2.13 IC2.14 IC2.19 IC2.22 IC2.23 IC2.24 VIT1.VIT1 VIT.VIT1

## Polygon pours and split planes (outlines as drawn)
GND_BT on Bottom Layer "GND_BT" (solid, pour order 24): 553.46,173.92 1023.01,173.92 1040.64,173.92 1040.64,292.08 1580.33,292.08 1597.96,292.08 cw(c1597.96,244.76) 1631.42,278.22 1813.88,95.76 1813.88,17.36 553.46,17.36
GND on Bottom Layer "GND" (solid, pour order 22): 2745.07,644.67 2745.07,156.14 2745.07,153.82 2745.07,150.53 2745.07,149.06 2744.27,149.06 2742.84,149.06 2737.99,149.06 1837.35,149.06 1837.35,17.03 2860.27,17.03 ccw(c2860.27,159.99) 3003.24,159.99 3003.24,597.56 3003.24,644.67
GND on Bottom Layer "GND" (solid, pour order 20): 1851.56,999.66 1851.56,604.62 3003.11,604.62 3003.11,627.35 3003.11,1349.69 ccw(c2852.01,1349.69) 2852,1500.8 2724.78,1500.8 2724.78,1241.71 2724.78,999.66
GND_BT on Bottom Layer "Bottom Layer-GND_BT" (solid, pour order 14): 1669.99,1520.21 1669.99,375.89 1011.76,377.38 876.42,377.38 874.53,379.27 555.61,379.27 555.6,17.39 84.66,17.39 cw(c71.55,89.65) 29.72,29.29 cw(c91.32,74.08) 16.09,85.96 16.09,1455.53 cw(c66.06,1450.33) 71.26,1500.29 882.09,1520.21 885.26,1520.21
GND_BT on Bottom Layer "Bottom Layer-GND_BT 1" (solid, pour order 18): 1656.12,1503.01 2698.9,1503.01 2698.9,1020.67 1825.44,1020.67 1825.44,579.14 2725.38,579.14 2725.38,219.46 2725.38,175.49 2681.42,175.49 1844.52,175.49 1644.91,375.1 1644.91,1386.12

## Keep-outs
Keep-Out Layer:
  lines w10: 0.33,68.78 0.33,1459.55 0.33,1469.3 cw(c50.33,1469.3) 50.33,1519.3 60.2,1519.3 2946.09,1519.3 2973.14,1519.3 cw(c2973.14,1474.45) 3004.85,1506.16 cw(c2964.6,1465.91) 3021.53,1465.91 3021.53,1451.44 3021.53,106.92 ; 69.1,0 2914.61,0
  lines w11: 0.33,68.78 0.33,47.69 ccw(c48.15,47.69) 48.15,-0.13 78.87,-0.13 ; 2907.71,-0.09 2982.56,-0.09 ccw(c2982.56,38.87) 3021.53,38.87 3021.53,106.92

## Other copper
Bottom Layer:
  region net GND: 3003.73,140.86 3003.73,82.76 cw(c2939.35,82.76) 2939.35,18.38 2883.07,18.38 2883.07,54.71
  region net GND: 2841.79,1500.78 2964.24,1500.77 cw(c2959.45,1457.11) 3003.11,1461.9 3003.11,1351.34
  pour cut-out: 275.1,1502.99 275.1,1293.23 886.4,1293.23 886.4,1502.98
  pour cut-out: 17.2,1019.51 764.54,1019.51 764.54,442.23 17.2,442.23
  region net GND: 1851.56,704.24 1851.56,775.74 1851.56,777.26 1852.19,777.26 1926.82,777.26 1907.42,724.39
  region net GND: 2233.71,643.08 2269.46,607.33 2272.18,604.61 2269.46,604.61 2200.15,604.61 2196.1,608.66
  region net GND: 1851.56,905.16 1851.56,813.95 1852.89,813.95 1956.78,813.95 1956.94,847.85
  region net GND_BT: 966.02,173.9 1085.36,173.68 1085.36,166.52 1064.99,146.15 1027.54,146.15 996.38,125.18
  region net GND_BT: 641.37,174.24 541.05,174.24 541.05,84.36 555.76,69.65 642.44,69.65 653.39,80.61
  region net GND_BT: 1553.69,292.08 1553.69,292.02 cw(c1602.31,255.81) 1627.92,281.42 1665.08,244.25 cw(c1595.14,174.3) 1694.06,174.3 1694.06,167.34 1605.21,167.34 cw(c1605.21,267.34) 1534.5,196.63 1512.93,218.2 ccw(c1474.69,256.44) 1528.78,256.44 1528.78,265.72
  pour cut-out: 1711,1384.95 ccw(c1711,1393.65) 1717.15,1387.5 ccw(c1731.02,1373.63) 1711.41,1373.63 1711.41,1057.97 cw(c1702.17,1057.97) 1708.7,1051.44 1501.08,843.82 cw(c1490.29,854.61) 1490.29,839.35 1465.38,839.35 1465.38,865.92 cw(c1482.79,865.92) 1470.48,878.23 1597.34,1005.1 ccw(c1526.63,1075.81) 1626.63,1075.81 1626.63,1381.85 cw(c1631.02,1381.85) 1627.92,1384.95
  region net GND: 2021.57,777.27 2056.5,777.27 cw(c2056.5,677.28) 2127.22,747.99 2134.93,740.27 cw(c2112.23,707.76) 2145.64,729.11 cw(c2120.94,724.19) 2145.64,719.27 2045.2,720.23 ccw(c2045.2,705.83) 2035.01,716.01
  region net GND: 2060.36,814.96 2072.27,814.96 cw(c2072.27,714.96) 2142.98,785.67 2152.28,776.37 2164.08,788.17 ccw(c2152.32,799.93) 2168.95,799.93 2154.87,799.93 cw(c2154.87,880.39) 2097.98,823.5 ccw(c2073.72,799.23) 2073.72,833.55 2060.22,833.55
  region net GND: 2783.61,1431.95 2741.2,1431.95 cw(c2741.2,1447.51) 2730.19,1436.5 cw(c2743.25,1449.57) 2724.78,1449.57 2724.78,1456.83 ccw(c2725.92,1457.96) 2725.92,1456.36 2753.98,1456.36
  region net GND: 2724.65,1289.17 2724.65,1299.28 cw(c2745.71,1299.28) 2730.82,1314.18 cw(c2744.91,1300.09) 2744.91,1320.01 2786.85,1320.01 2787.01,1319.85

## Silkscreen, mask and mechanical layers (free items; w line width, h text height)
Top Overlay:
  text "+" at 1273.35,1427.4 h59.06
  text "-" at 892.35,1423.11 h59.06
  text "-" at 1820.65,1173.26 h59.06
  text "+" at 1497.5,1172.08 h59.06
  text "C" at 1718.44,1169.12 h59.06
  text "I" at 1617.42,1168.53 h59.06
  text "+" at 2858.12,1100.53 h59.06
  text "FSC - BT806" at 234.11,534.39 h39.37 r90
  text "-" at 2865.22,531.06 h59.06
  text "ViTech" at 78.04,423.28 h39.37 r270

## Dimensions
-26.62,0.75 to -18.51,1519.43 on Top Overlay
6.28,-48.56 to 3022.52,-35.55 on Top Overlay

## Text inside footprints (layer, text, board x,y; h text height)
L2: Top Overlay "K" at 2417.54,1427.33 h39.37 r270; Top Overlay "A" at 2415.96,1342.29 h39.37 r270